# Altium PCB V1.PcbDoc
Units mil, origin at the board's own origin, x right, y up, seen from the top; angles counter-clockwise.
Board outline 3550 x 3550 mil, 2 copper layers (Top Layer, Bottom Layer); 16 components, 14 nets, 87 pads, 0 vias.
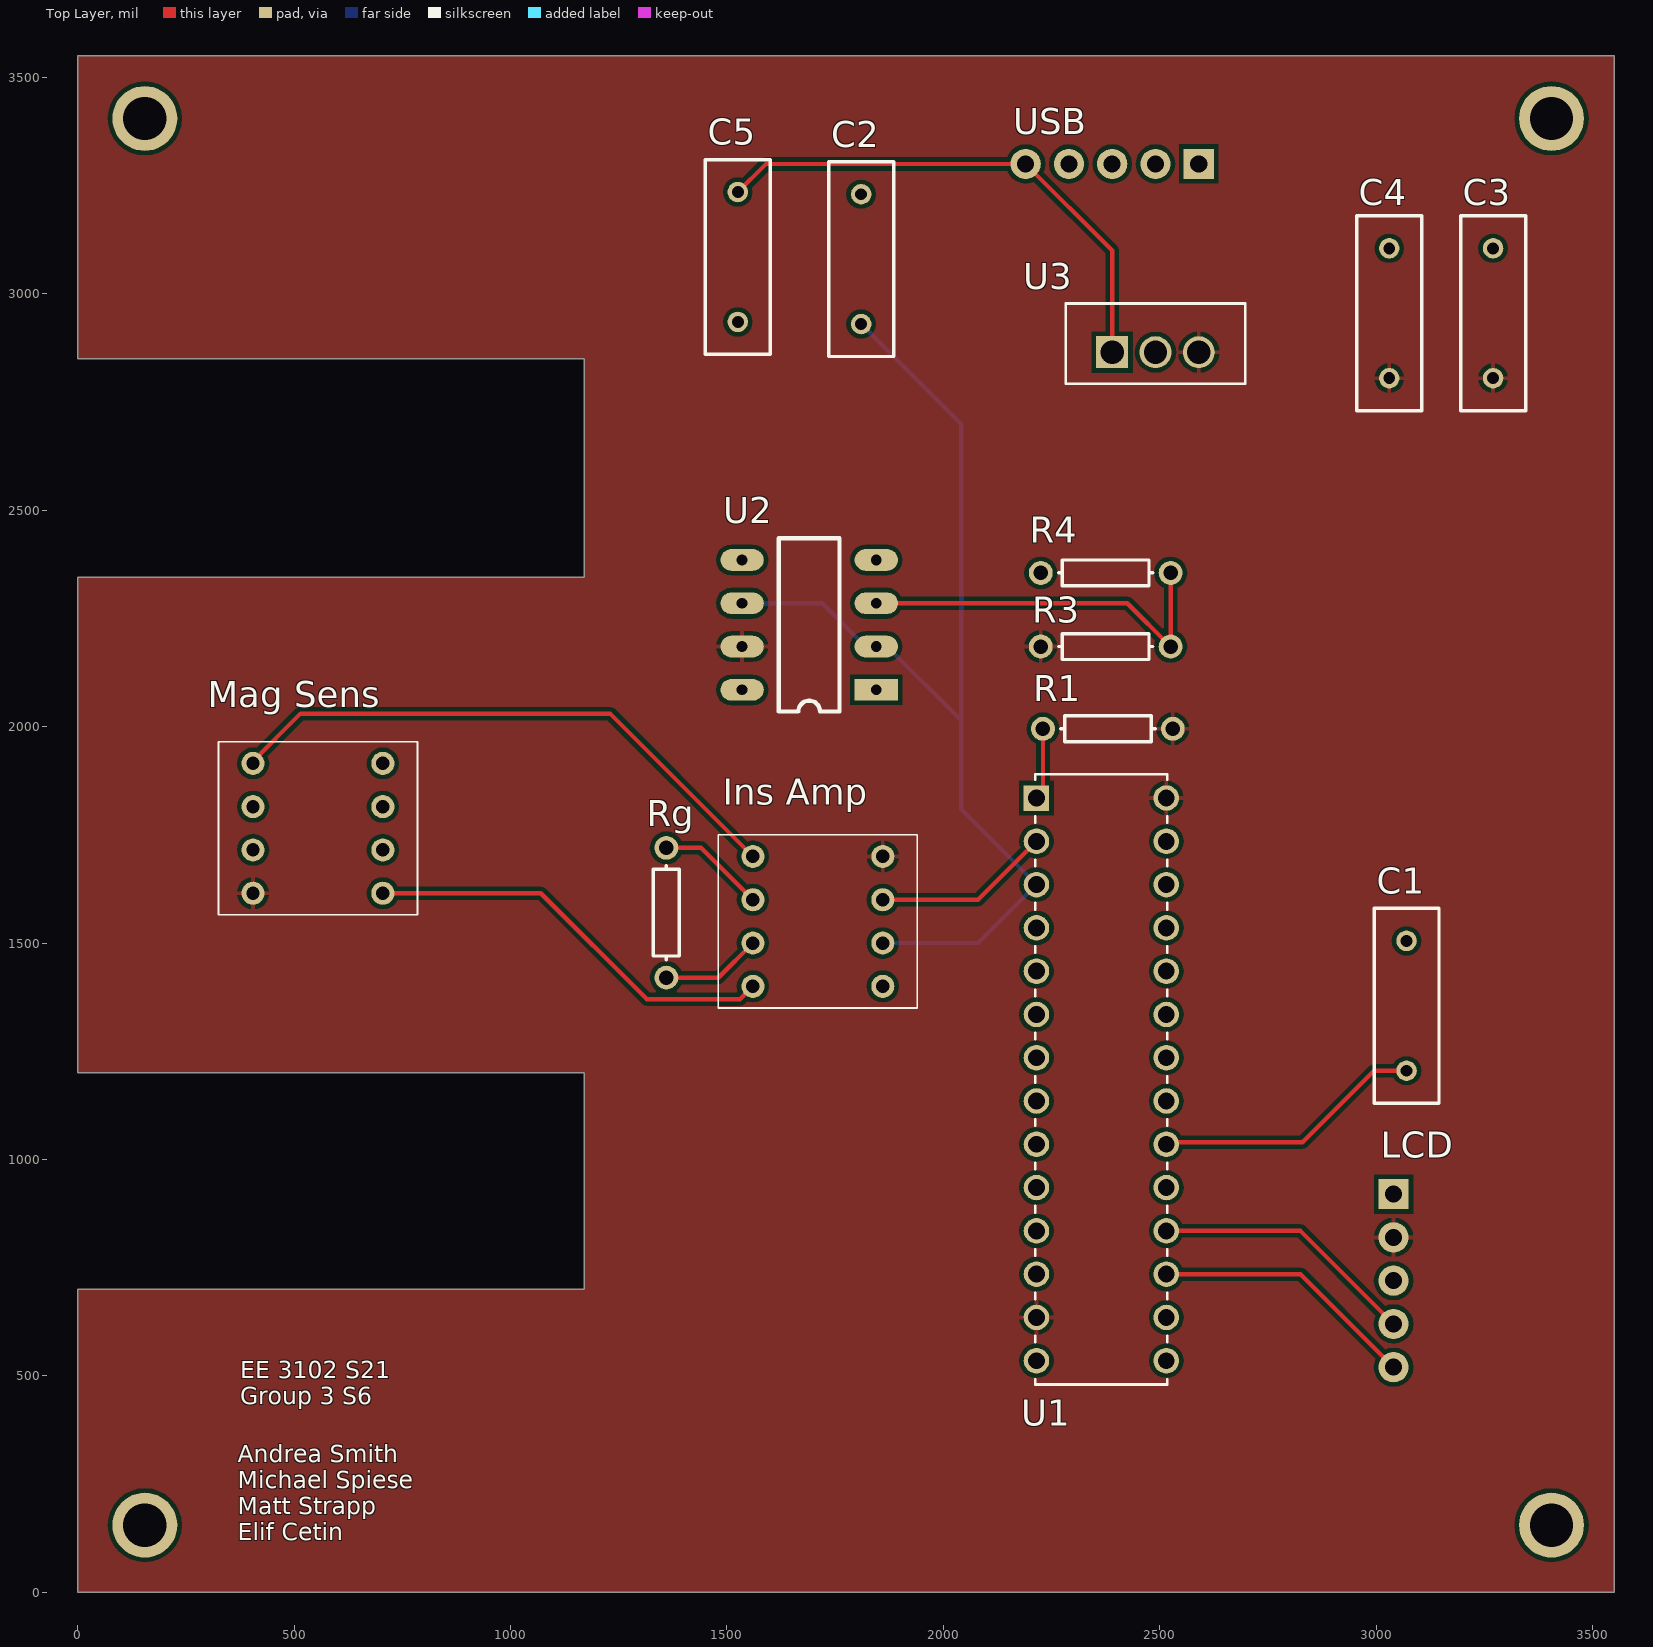
[diagram p0: Top Layer view]
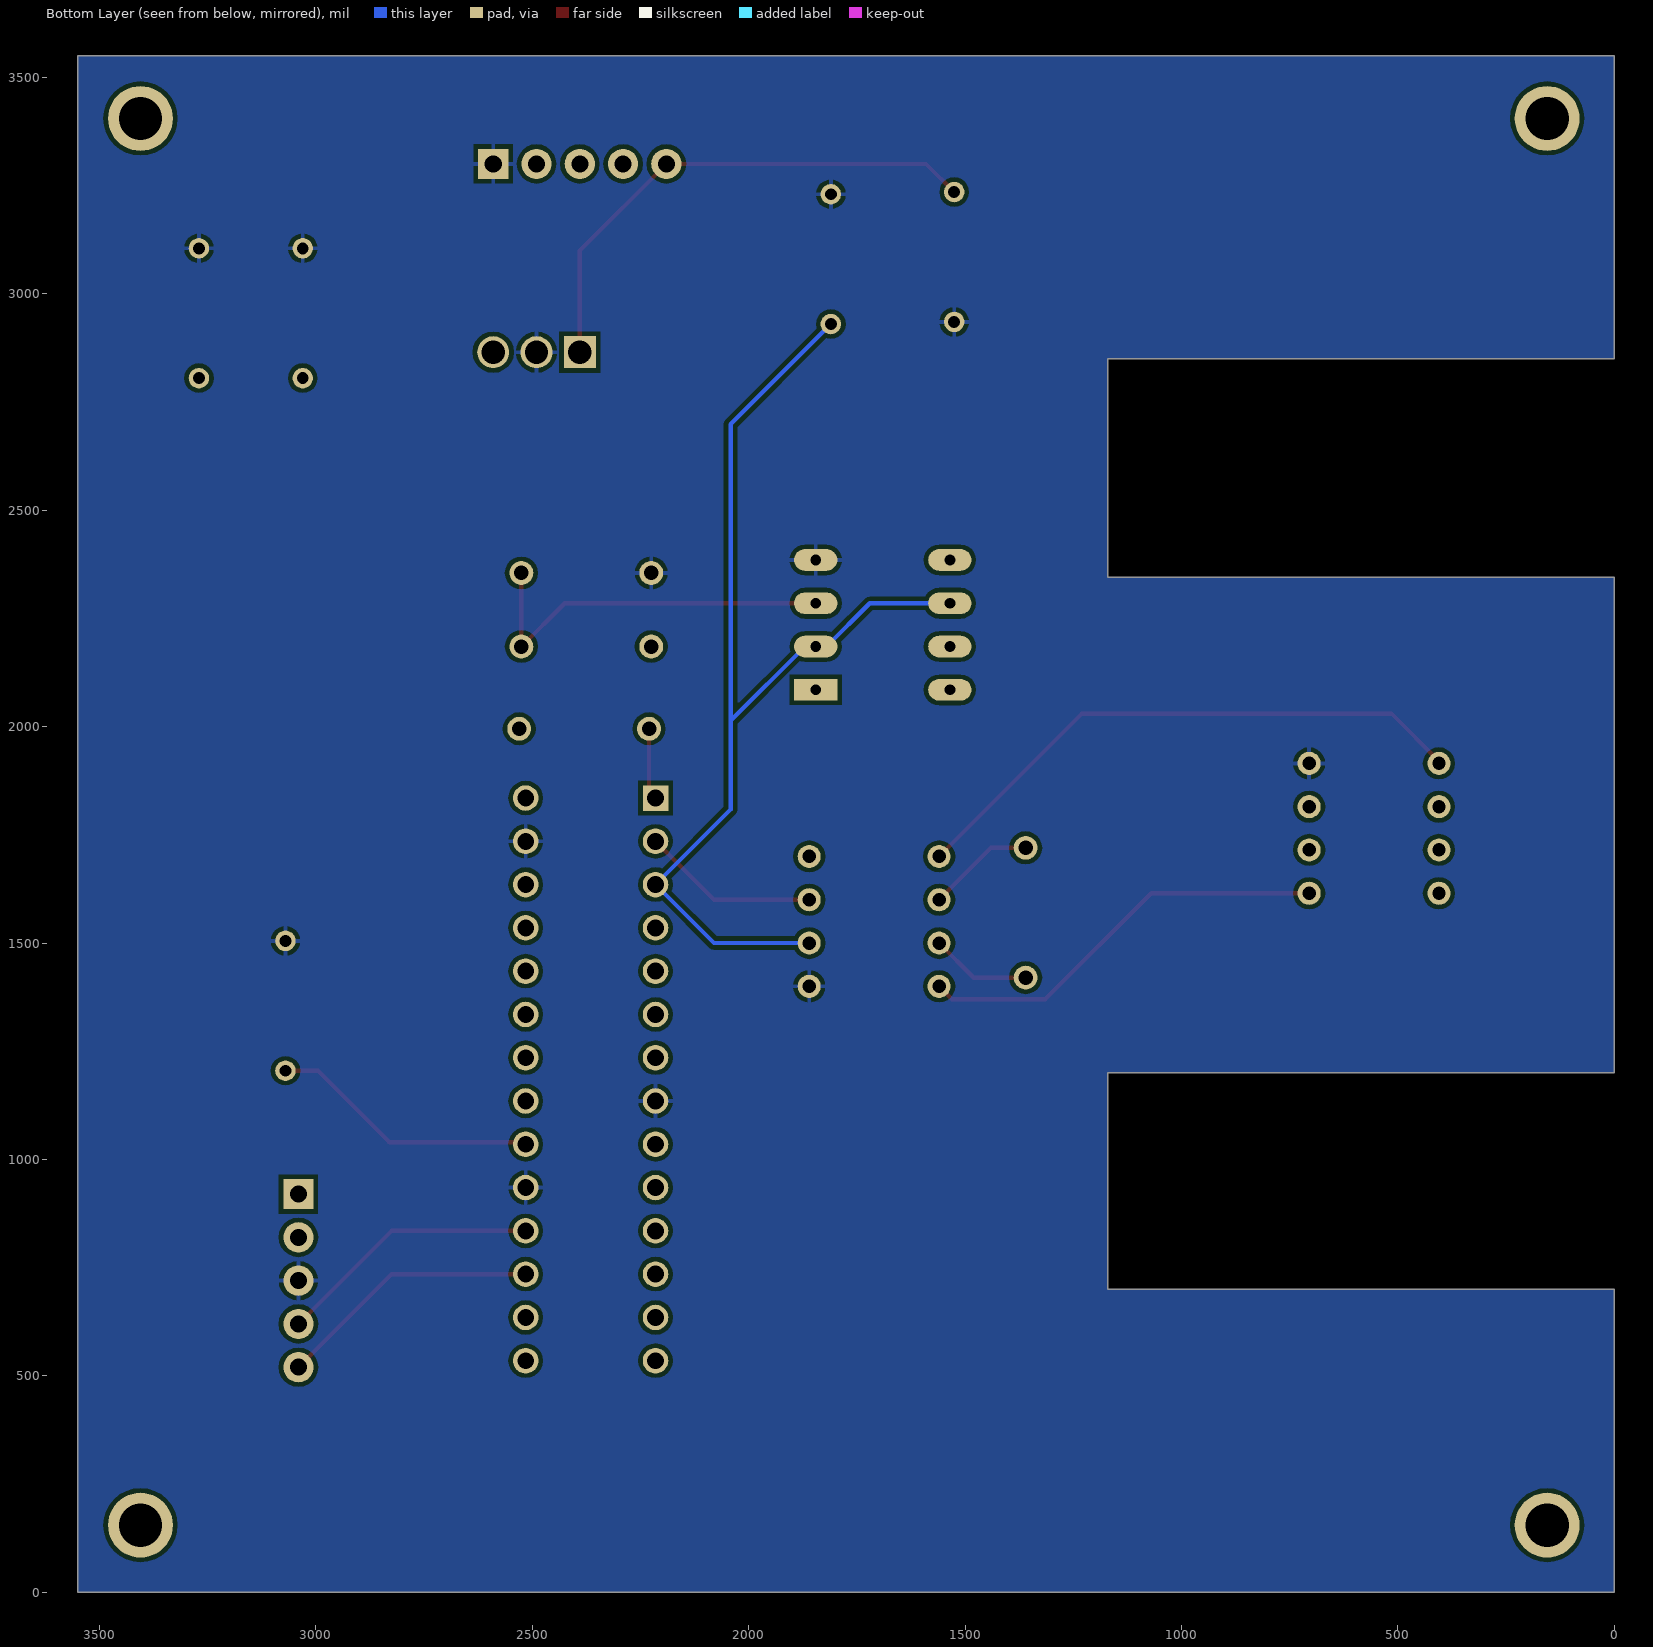
[diagram p1: Bottom Layer view, seen from below]

## Layer stack, top to bottom
Top Solder: solder mask 0.4, Solder Resist, Dk 3.5
Top Layer: signal copper 1.4
Dielectric 1: dielectric 12.6, FR-4, Dk 4.8
Bottom Layer: signal copper 1.4
Bottom Solder: solder mask 0.4, Solder Resist, Dk 3.5

## Board outline
0,0 0,700 1170,700 1170,1200 0,1200 0,2345 1170,2345 1170,2850 0,2850 0,3550 3550,3550 3550,0

## Design rules (kind name [scope] priority, off if disabled: settings)
Clearance [All] p1: gap=10 ignorepadtopadclearanceinfootprint=FALSE except(0: Arc-Hole Track-Hole SMDPad-Hole THPad-Hole Via-Hole Fill-Hole Poly-Hole Region-Hole Text-Hole)
PolygonConnect [All] p1: connectstyle=Relief reliefconductorwidth=10 reliefentries=4 polygonreliefangle="90 Angle" airgapwidth=10
RoutingVias [All] p1: holewidth=28 width=50 viastyle="Through Hole" minholewidth=28 minwidth=50 maxholewidth=28 maxwidth=50
SolderMaskExpansion [All] p1: expansion=4 istentingtop=FALSE
Width [All] p1: maxlimit=10 minlimit=10 preferedwidth=10
30 further rules are at their usual default settings.

## Classes and differential pairs
component class V1: J1 J2 JP1 JP2 R2

## Components (designator, comment, footprint, x,y, rotation, side; value= is the part's Value field where it differs from the comment)
C1 "Cap" RAD-0.3 3070,1355 r270 top value=100pF
C2 "Cap" RAD-0.3 1810,3080 r270 top value=100pF
C3 "Cap" RAD-0.3 3270,2955 r270 top value=10uF
C4 "Cap" RAD-0.3 3030,2955 r90 top value=0.1uF
C5 "Cap" RAD-0.3 1525,3085 r270 top value=0.1uF
"Ins Amp" "INS AMP" 0835000011RC 1560,1700 r270 top (schematic designator J2)
LCD "LCD Header" 1X05_ROUND_70 3040,720 r270 top (schematic designator JP2)
"Mag Sens" "MAG SENS" 0835000011RC 705,1615 r90 top (schematic designator J1)
R1 "Res1" AXIAL-0.3 2380,1995 r180 top value=1K
R3 "Res1" AXIAL-0.3 2375,2185 r180 top value=1K
R4 "Res1" AXIAL-0.3 2375,2355 r0 top value=1K
Rg "Res1" AXIAL-0.3 1360,1570 r90 top value=1K (schematic designator R2)
U1 "PIC24FJ64GA002-I/SP" SPDIP28_300MC_MCH 2215,1835 r0 top
U2 "LM741CN/NOPB" "LM741 Custom Footprint" 1845,2085 r180 top
U3 "LM2937ET-3.3/NOPB" T03B 2590,2905 r0 top (schematic designator U?)
USB "USB HEADER" 1X05_ROUND_70 2390,3300 r180 top (schematic designator JP1)

## Footprints (in the part's own frame and the unit in brackets; to place one, negate y for a bottom-side part, rotate by r counter-clockwise, add the part's x,y. Pads: shape width x height; smd on the part's side, far side on the other; paste and mask are expansions set on the pad)
1X05_ROUND_70 [mil]
  rect 70x70 / inner round 0 / far side rect 70x70 hole 39.37: 1(-200,0)
  round 70 / inner round 0 / far side round 70 hole 39.37: 2(-100,0) 3(0,0) 4(100,0) 5(200,0)
  body extent -254,-35 235,35, height 150
0835000011RC [mm]
  round 1.354 hole 0.79: 1(0,0) 2(2.54,0) 3(5.08,0) 4(7.62,0) 5(7.62,7.62) 6(5.08,7.62) 7(2.54,7.62) 8(0,7.62)
  silkscreen extent -1.27,-2.03 8.89,9.65, body extent -1.27,-2.03 8.89,9.65, height 2.19
AXIAL-0.3 [mm] "Axial Device, Thru-Hole; 2 Leads; 0.3 in Pin Spacing"
  round 1.4 hole 0.85: 1(-3.81,0) 2(3.81,0)
  silkscreen extent -2.77,-0.76 2.77,0.76
"LM741 Custom Footprint" [mil]
  rect 100x50 hole 25: 1(0,0)
  oval 100x50 hole 25: 2(0,-100) 3(0,-200) 4(0,-300) 5(310,-300) 6(310,-200) 7(310,-100) 8(310,0)
  silkscreen extent 85,-350 225,50
RAD-0.3 [mm] "Radial Cap, Thru-Hole; 2 Leads; 0.3 in Pin Spacing"
  round 1.2 hole 0.7: 1(-3.81,0) 2(3.81,0)
  silkscreen extent -5.71,-1.91 5.71,1.91
SPDIP28_300MC_MCH [mil]
  rect 59x59 hole 39: 1(0,0)
  round 59 hole 39: 2(0,-100) 3(0,-200) 4(0,-300) 5(0,-400) 6(0,-500) 7(0,-600) 8(0,-700) 9(0,-800) 10(0,-900) 11(0,-1000) 12(0,-1100) 13(0,-1200) 14(0,-1300) 15(300,-1300) 16(300,-1200) 17(300,-1100) 18(300,-1000) 19(300,-900) 20(300,-800) 21(300,-700) 22(300,-600) 23(300,-500) 24(300,-400) 25(300,-300) 26(300,-200) 27(300,-100) 28(300,0)
  silkscreen extent -2,-1355 302,55, body extent 0,0 10,10, height 10
T03B [mil]
  rect 74x74 hole 54: 1(-200,-40)
  round 74 hole 54: 2(-100,-40) 3(0,-40)
  silkscreen extent -308,-112 108,72, body extent 0,0 10,10, height 10

## Part data
C1 C2 C3 C4 C5: "Capacitor", LatestRevisionDate=17-Jul-2002, LatestRevisionNote="Re-released for DXP Platform.", PackageDescription="Radial Cap, Thru-Hole; 2 Leads; 0.3 in Pin Spacing", PackageReference=RAD-0.3, Published=8-Jun-2000, Publisher="Altium Limited"
"Ins Amp" "Mag Sens": library part 08-350000-11-RC, "Connector", Manufacturer_Name=ARIES, Mouser Part Number=535-08-350000-11-RC, Datasheet Link=https://componentsearchengine.com/Datasheets/2/08-350000-11-RC.pdf, Height=2.09mm, Manufacturer_Part_Number=08-350000-11-RC, Mouser Price/Stock=https://www.mouser.co.uk/ProductDetail/Aries-Electronics/08-350000-11-RC/?qs=ke0bxZO6vzv2wOqUZXyEcQ%3D%3D
LCD: library part HEADER-1X570MIL, "PIN HEADER for", DeviceName=70MIL, DeviceSetName=HEADER-1X5, GateName_1=A, LibraryName=microbuilder, SymbolName_1=PINHD5
R1 R3 R4 Rg: "Resistor", LatestRevisionDate=17-Jul-2002, LatestRevisionNote="Re-released for DXP Platform.", PackageDescription="Axial Device, Thru-Hole; 2 Leads; 0.3 in Pin Spacing", PackageReference=AXIAL-0.3, Published=8-Jun-2000, Publisher="Altium Limited"
U1: "No Description Available", Built_By=EMA_Jessica, Copyright="Copyright (C) 2018 Accelerated Designs. All rights reserved", Manufacturer_Part_Number=PIC24FJ64GA002-I/SP, RefDes=RefDes, SourceLibrary=Microchip_2019-08-23_10, Type=DEV, Vendor=Microchip
U2: "No Description Available", Manufacturer=NationalSemiconductor, PartNumber=LM741CN, Characteristics=LM741CNGeneralPurposeOpAmp, ComponentLink1DescBC=LM741Datasheet, ComponentLink1URL=http//wwwnationalcom/ds/LM/LM741pdf, ComponentLink2DescA4=LM741WebPage, ComponentLink2URL=http//wwwnationalcom/pf/LM/LM741html, ComponentLink3DescAC=N08EPackageWebPage, ComponentLink3URL=http//wwwnationalcom/packaging/folders/n08ehtml, CompType=OpAmpIC, Copyright="Copyright (C) 2018 Accelerated Designs. All rights reserved", LatestRevisionDate=2009-03-16, LatestRevisionNote=MassUpdate, PackageDescription=8LeadPlasticDIP, PackageReference=N08E_L, Published=2009-03-16, Publisher=NationalSemiconductor, RoHS=O, Sim=NoteBalancepinsnotmodeled, SymbolVersion=2008-07-09, TaMax_C=700, TaMin_C=00, Version=B1608
U3: "No Description Available", PartNumber=LM2937ET-10, base_pn=LM2937, Comp=TypeLDO, Copyright="Copyright (C) 2018 Accelerated Designs. All rights reserved", Library=ReferenceLM2937ET, Pin=Count3, RefDes=RefDes, Symbol=NameLM2937ET-10, Type=DEV, Vendor=NationalSemiconductor, Version=1
USB: library part HEADER-1X570MIL, "PIN HEADER", DeviceName=70MIL, DeviceSetName=HEADER-1X5, GateName_1=A, LibraryName=microbuilder, SymbolName_1=PINHD5

## Free pads (board coordinates)
  round 150 hole 100: 4(155,155) 5(155,3405) 6(3405,3405) 7(3405,155)

## Nets (pads, with @x,y where several pads share a name; then routed paths per layer and width w, separated by ;. In a path a pad name is that pad's centre, name@x,y a point inside that pad or via, vN(x,y) a via of type N, cw(c..) or ccw(c..) an arc to the next point about the centre after c; other vN are vias at no path point)
GND: "Ins Amp.5" "Mag Sens.4" C1.1 C2.1 C3.1 C4.2 C5.2 LCD.3 R4.1 U1.8 U1.19 U1.27 U2.4 U3.2 USB.1
NetC1_2: C1.2 U1.20 | length 625.4
  Top Layer w10: U1.20 2520,1040 2830,1040 2995,1205 C1.2
NetC5_1: C5.1 U3.1 USB.5 | length 1209.8
  Top Layer w10: C5.1 1590,3300 USB.5 2390,3100 U3.1
NetJ1_1: "Ins Amp.4" "Mag Sens.1" | length 968.9
  Top Layer w10: 705,1615 1070,1615 1315,1370 1530,1370 1560,1400
NetJ1_5: "Ins Amp.1" "Mag Sens.5" | length 1342.3
  Top Layer w10: 405,1915 405,1920 515,2030 1230,2030 1560,1700
NetJ2_2: "Ins Amp.2" Rg.2 | length 249.7
  Top Layer w10: Rg.2 1440,1720 1560,1600
NetJ2_3: "Ins Amp.3" Rg.1 | length 233.1
  Top Layer w10: Rg.1 1480,1420 1560,1500
NetR1_2: R1.2 U1.1 | length 166.2
  Top Layer w10: U1.1 2230,1850 R1.2
NetR3_1: R3.1 R4.2 U2.3 | length 891.4
  Top Layer w10: U2.3 2425,2285 R3.1 R4.2
SCL: LCD.5 U1.17 | length 614.1
  Top Layer w10: U1.17 2825,735 LCD.5
SDA: LCD.4 U1.18 | length 614.1
  Top Layer w10: U1.18 2825,835 LCD.4
VDD: "Ins Amp.8" "Mag Sens.8" C3.2 C4.1 LCD.2 R1.1 R3.2 U1.13 U1.28 U2.7 U3.3
Vout: "Ins Amp.7" U1.2 | length 410.9
  Top Layer w10: 1860,1600 2080,1600 U1.2
Vref: "Ins Amp.6" C2.2 U1.3 U2.2 U2.6 | length 2517.8
  Top Layer w10: U2.2@1820,2185 U2.2
  Bottom Layer w10: U2.6 1720,2285 1820,2185 U2.2 1870,2185 2041.64,2013.36 ; C2.2 2041.64,2698.36 2041.64,2013.36 ; 1860,1500 2080,1500 U1.3 2041.64,1808.36 2041.64,2013.36
pads on no net: "Mag Sens.2" "Mag Sens.3" "Mag Sens.6" "Mag Sens.7" LCD.1 U1.4 U1.5 U1.6 U1.7 U1.9 U1.10 U1.11 U1.12 U1.14 U1.15 U1.16 U1.21 U1.22 U1.23 U1.24 U1.25 U1.26 U2.1 U2.5 U2.8 USB.2 USB.3 USB.4

## Polygon pours and split planes (outlines as drawn)
VDD on Top Layer "VDD_L01_P001" (solid, pour order 1): 0,3550 0,2850 1170,2850 1170,2345 0,2345 0,1200 1170,1200 1170,700 0,700 0,0 3550,0 3550,3550
GND on Bottom Layer "GND_L02_P002" (solid, pour order 2): 0,3550 0,2850 1170,2850 1170,2345 0,2345 0,1200 1170,1200 1170,700 0,700 0,0 3550,0 3550,3550

## Silkscreen, mask and mechanical layers (free items; w line width, h text height)
Top Overlay:
  text "EE 3102 S21 / Group 3 S6" at 375,435 h40
  text "Andrea Smith / Michael Spiese / Matt Strapp / Elif Cetin" at 370,120 h40
Mechanical 1:
  the board outline again, w10

## Text inside footprints (layer, text, board x,y; h text height)
U1: Mechanical 13 "*" at 2215,1810 h50